# EAGLE board nixie-in2-x2 (EAGLE 5.04)
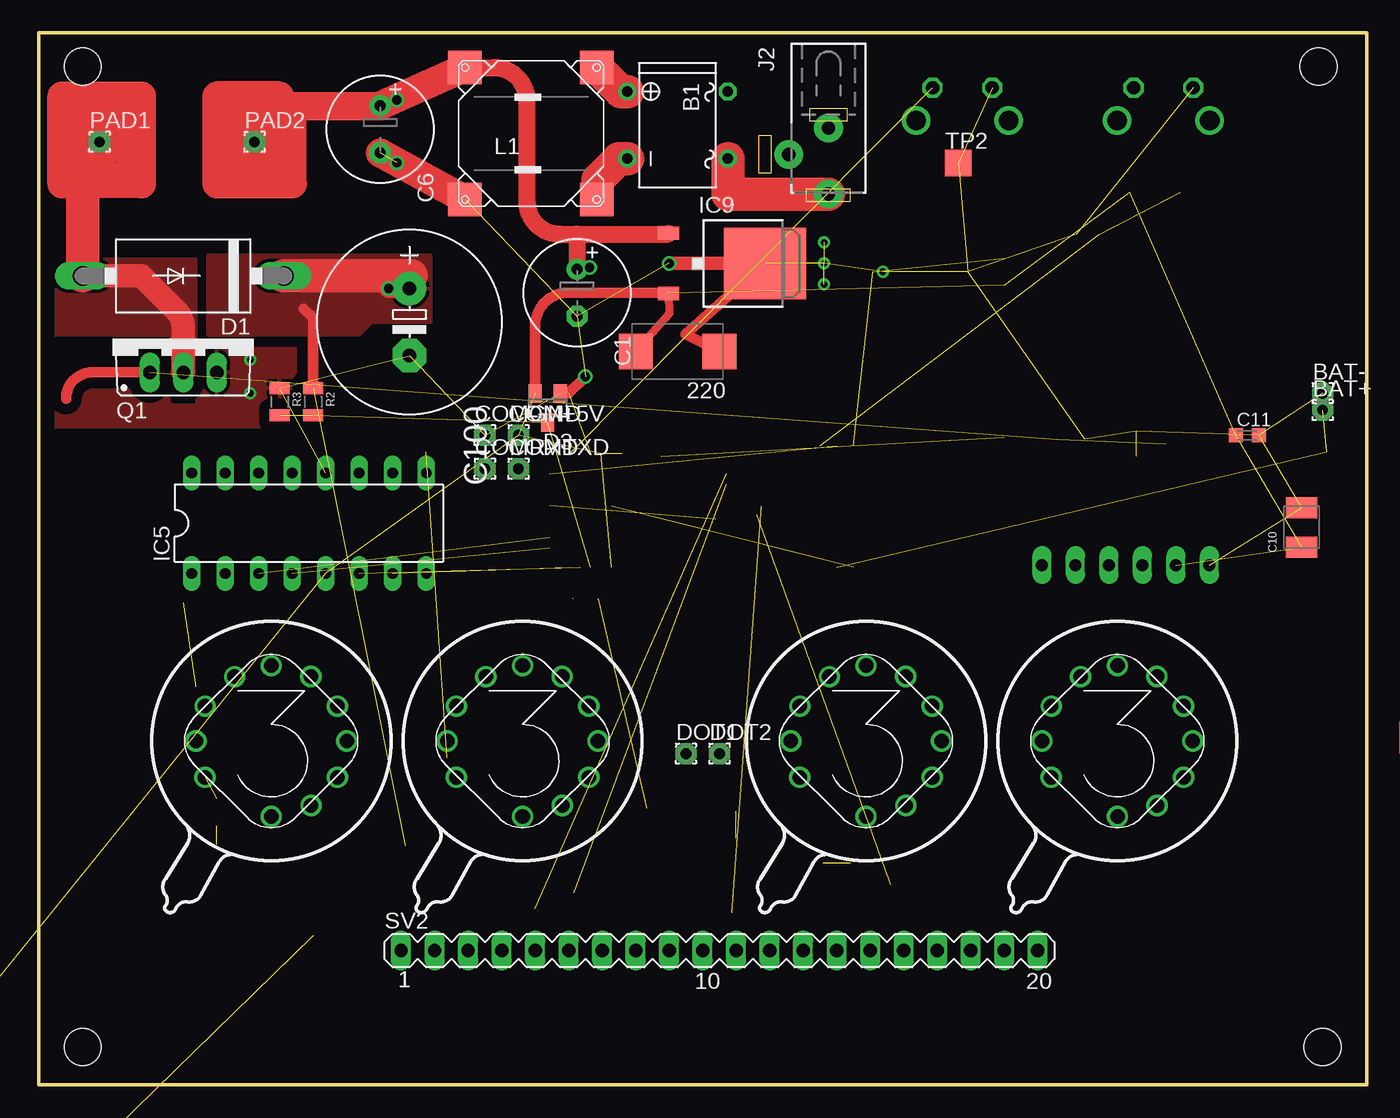
[diagram p0: board, top side]
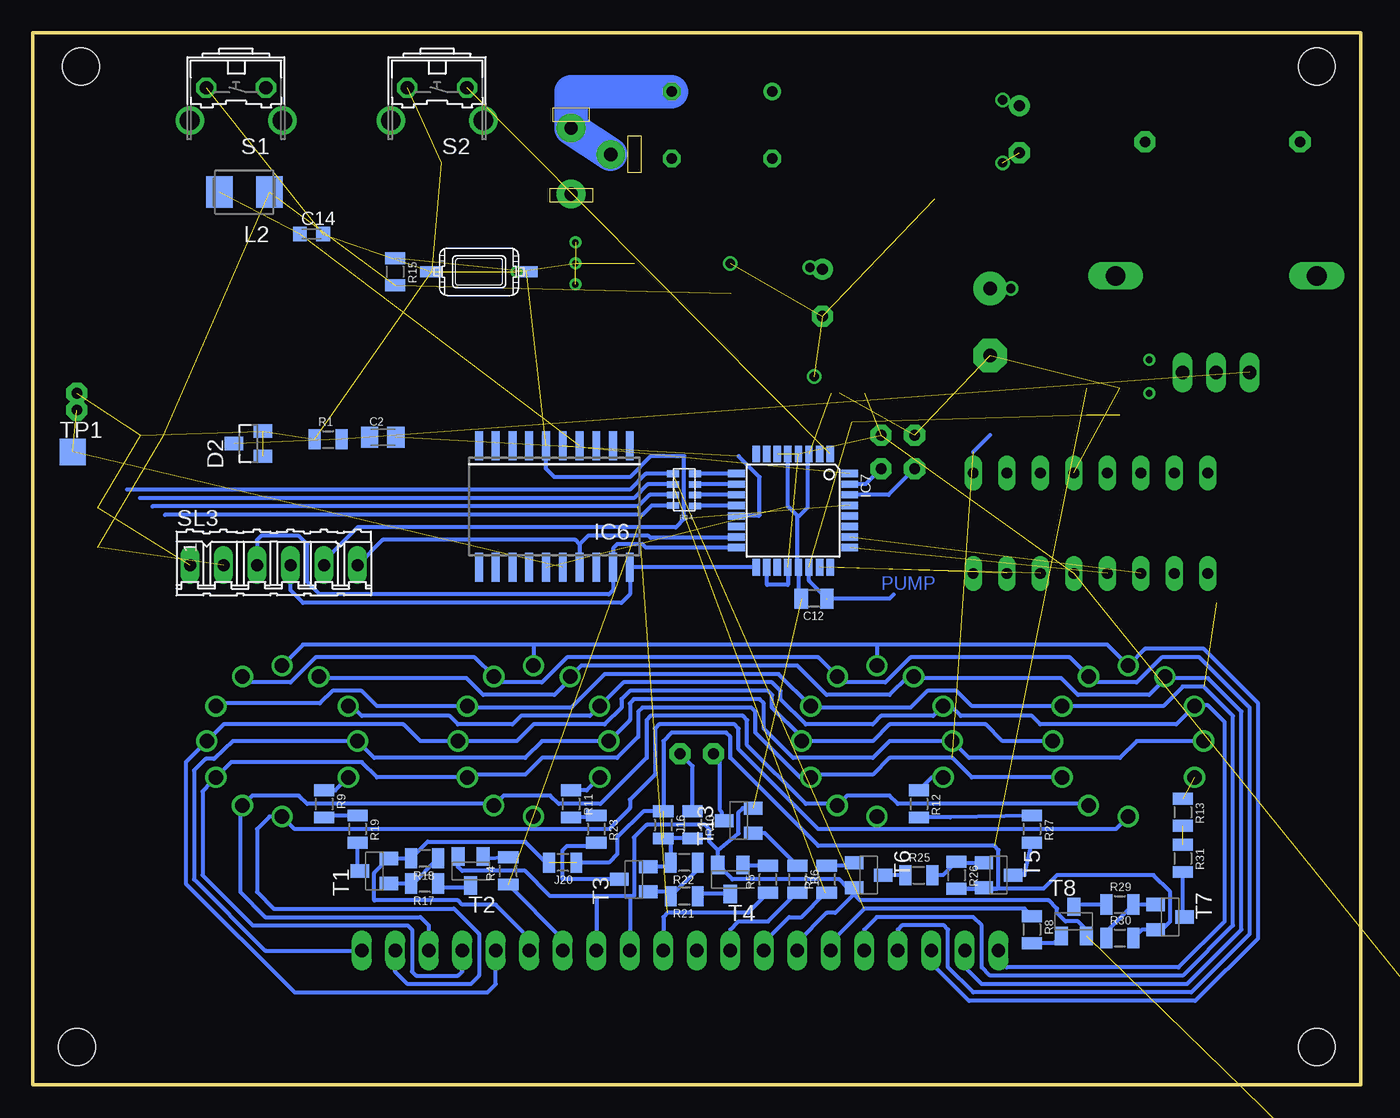
[diagram p1: board, bottom side, seen from below]

Size 100.64 x 79.68 mm. Coordinates in mm from the lower left corner, seen from the top.
Outline: 0,0 100.64,0 100.64,79.68 0,79.68 0,0
Copper layers (1*16): Top 0.035mm / dielectric 1.5mm / Bottom 0.035mm
Design rules "default *": minimum track width 10mil, minimum drill 24mil, track to track 10mil, track to pad 10mil, pad to pad 8mil, via to via 8mil, smd to smd 8mil, copper to edge 40mil, drill to drill 8mil, minimum pad ring 10mil, minimum via ring 8mil, stop-mask expansion 4mil, vias tented up to drill 0mil, thermal gap 10mil
Holes 2.8 mm at 3.33,2.85 3.33,77.15 96.99,77.15 97.31,2.85
tRestrict: area 5.6,65.1 to 18.6,78.1; area 72.9,35.2 to 78.9,40.3; area 64.3,30.2 to 84.6,32.7
bRestrict: area 0.2,63.8 to 22.7,79.4; area 85.9,46.7 to 89.4,52.7; 4 lines

## Footprints (pad centres in the part's own frame; a part is rotated, then mirrored left to right if it is on the bottom)
D/7343-31R = smd 2.55 x 2.7: + 3.175,0; - -3.175,0
B-DIL = drill 0.813 round: + -2.54,-3.81 | drill 0.813 octagon: - 2.54,-3.81; AC1 2.54,3.81; AC2 -2.54,3.81
1,6/0,8 = drill 0.813 pad 1.6 octagon: 1 0,0
E3,5-8 = drill 0.813 pad 1.6 round: + -1.778,0 | drill 0.813 pad 1.6 octagon: - 1.778,0
C0805K = smd 1.3 x 1.6: 1 -1,0; 2 1,0
SMC_B = smd 1.6 x 2.4: + -1.5,0; - 1.5,0
C0603K = smd 1.05 x 1.08: 1 -0.875,0; 2 0.875,0
C0805S = smd 1.016 x 1.524: 1 -0.977,0; 2 0.977,0
E5-13 = drill 1.016 pad 2.54 round: + -2.54,0 | drill 1.016 pad 2.54 octagon: - 2.54,0
DO201-15 = drill 1.499 long: A 7.62,0; C -7.62,0
SOT23 = smd 1 x 1.4: 1 -0.95,-1.1; 2 0.95,-1.1; 3 0,1.1
SOT23@1 = smd 1 x 1.4: 1 -0.95,-1.1; 2 0.95,-1.1; 3 0,1.1
DIL16 = drill 0.813 long: 1 -8.89,-3.81; 2 -6.35,-3.81; 3 -3.81,-3.81; 4 -1.27,-3.81; 5 1.27,-3.81; 6 3.81,-3.81; 7 6.35,-3.81; 8 8.89,-3.81; 9 8.89,3.81; 10 6.35,3.81; 11 3.81,3.81; 12 1.27,3.81; 13 -1.27,3.81; 14 -3.81,3.81; 15 -6.35,3.81; 16 -8.89,3.81
SO-20DW = smd 0.6 x 2.2: 1 -5.715,-4.6; 2 -4.445,-4.6; 3 -3.175,-4.6; 4 -1.905,-4.6; 5 -0.635,-4.6; 6 0.635,-4.6; 7 1.905,-4.6; 8 3.175,-4.6; 9 4.445,-4.6; 10 5.715,-4.6; 11 5.715,4.6; 12 4.445,4.6; 13 3.175,4.6; 14 1.905,4.6; 15 0.635,4.6; 16 -0.635,4.6; 17 -1.905,4.6; 18 -3.175,4.6; 19 -4.445,4.6; 20 -5.715,4.6
TQFP32-08 = smd 1.27 x 0.559: 1 -4.293,2.8; 2 -4.293,2; 3 -4.293,1.2; 4 -4.293,0.4; 5 -4.293,-0.4; 6 -4.293,-1.2; 7 -4.293,-2; 8 -4.293,-2.8; 17 4.293,-2.8; 18 4.293,-2; 19 4.293,-1.2; 20 4.293,-0.4; 21 4.293,0.4; 22 4.293,1.2; 23 4.293,2; 24 4.293,2.8 | smd 0.559 x 1.27: 9 -2.8,-4.293; 10 -2,-4.293; 11 -1.2,-4.293; 12 -0.4,-4.293; 13 0.4,-4.293; 14 1.2,-4.293; 15 2,-4.293; 16 2.8,-4.293; 25 2.8,4.293; 26 2,4.293; 27 1.2,4.293; 28 0.4,4.293; 29 -0.4,4.293; 30 -1.2,4.293; 31 -2,4.293; 32 -2.8,4.293
TO252 = smd 1 x 1.6: 1 -2.28,-4.8; 2 2.28,-4.8 | smd 5.4 x 6.2: 3 0,2.5
DCJ-SMALL = drill 1 pad 2.184 round: 1 0,3; 2 3,0; 3 0,-2
R0805-SVO = smd 0.9 x 1.524: 1 -1.027,0; 2 1.027,0
WE-SL2_74422... = smd 2.54 x 2.54: A1 -5,5; A2 5,5; B1 -5,-5; B2 5,-5
L4532M = smd 2 x 2.4: 1 -1.9,0; 2 1.9,0
IN-2 = drill 1.1 round: 0 -5.715,0; 1 0,-5.715; 2 3.016,-4.889; 3 5.02,-2.75; 4 5.715,0; 5 5.012,2.643; 6 3,4.897; 7 0,5.715; 8 -2.778,4.881; 9 -5.012,2.643; A -5.02,-2.75
TO220BV = drill 1.016 long: D 0,-2.54; G -2.54,-2.54; S 2.54,-2.54
RESSMD-YC16 = smd 0.508 x 0.914: R1$1 -1.23,-0.821; R1$2 -1.2,0.851; R2$1 -0.4,-0.821; R2$2 -0.4,0.851; R3$1 0.4,-0.821; R3$2 0.4,0.851; R4$1 1.2,-0.821; R4$2 1.2,0.851
B3F-31XX = drill 1.016 octagon: 1 -2.261,-1.245; 2 2.261,-1.245 | drill 1.499 pad 2.159 round: 3 -3.505,1.245; 4 3.505,1.245
06P = drill 0.914 long: 1 -6.35,0; 2 -3.81,0; 3 -1.27,0; 4 1.27,0; 5 3.81,0; 6 6.35,0
MA20-1 = drill 1.016 long: 1 -24.13,0; 2 -21.59,0; 3 -19.05,0; 4 -16.51,0; 5 -13.97,0; 6 -11.43,0; 7 -8.89,0; 8 -6.35,0; 9 -3.81,0; 10 -1.27,0; 11 1.27,0; 12 3.81,0; 13 6.35,0; 14 8.89,0; 15 11.43,0; 16 13.97,0; 17 16.51,0; 18 19.05,0; 19 21.59,0; 20 24.13,0
SW_IT1181 = smd 1.676 x 0.813: P$1 -3.61,0; P$2 3.61,0
SOT23-BEC = smd 1 x 1.4: B -0.95,-1.1; C 0,1.1; E 0.95,-1.1
TP20SQ = smd 2 x 2: TP 0,0

## Placement (x,y rotation side)
220  [D/7343-31R]  48.41,55.56 180 top
B1  [B-DIL]  48.41,72.7 270 top
BAT+  [1,6/0,8]  97.31,51.11 0 top
BAT-  [1,6/0,8]  97.31,52.38 0 top
C1  100/24V  [E3,5-8]  40.79,60 270 top
C2  33nF  [C0805K]  74.13,49.05 0 bottom
C5  10uF  [SMC_B]  -92.24,-100.33 0 top  (outside the outline)
C6  100/24V  [E3,5-8]  25.87,72.39 270 top
C9  10uF  [SMC_B]  -97.32,-100.33 0 top  (outside the outline)
C10  10uF  [SMC_B]  95.72,42.22 90 top
C11  100nF  [C0603K]  91.59,49.21 0 top
C12  1.0  [C0805S]  41.43,36.83 180 bottom
C13  100nF  [C0603K]  -96.05,-107.95 0 top  (outside the outline)
C14  100nF  [C0603K]  79.53,64.45 0 bottom
C15  100nF  [C0603K]  -96.05,-113.03 0 top  (outside the outline)
C100  10uF/250V  [E5-13]  28.09,57.78 270 top
COM+5V  [1,6/0,8]  36.35,49.21 0 top
COMGND  [1,6/0,8]  33.81,49.21 0 top
COMRXD  [1,6/0,8]  33.81,46.67 0 top
COMTXD  [1,6/0,8]  36.35,46.67 0 top
D1  31DF6  [DO201-15]  10.95,61.27 180 top
D2  BAT54C  [SOT23]  84.29,48.57 90 bottom
D3  BAT54S  [SOT23@1]  38.57,51.27 180 top
DOT1  [1,6/0,8]  49.05,25.08 0 top
DOT2  [1,6/0,8]  51.59,25.08 0 top
IC5  74141N  [DIL16]  20.47,42.54 0 top
IC6  DS3234  [SO-20DW]  61.11,43.81 180 bottom
IC7  MEGA8-AI  [TQFP32-08]  43.02,43.49 270 bottom
IC9  7805DT  [TO252]  52.54,62.23 270 top
J2  [DCJ-SMALL]  59.84,70.48 180 top
J16  000  [R0805-SVO]  52.86,19.68 270 bottom
J20  000  [R0805-SVO]  60.48,16.82 180 bottom
L1  CHOKE-510-1010  [WE-SL2_74422...]  37.3,72.07 180 top
L2  [L4532M]  84.61,67.62 180 bottom
N1  IN-2  [IN-2]  81.75,26.03 0 top
N2  IN-2  [IN-2]  62.7,26.03 0 top
N3  IN-2  [IN-2]  36.66,26.03 0 top
N4  IN-2  [IN-2]  17.61,26.03 0 top
PAD1  [1,6/0,8]  4.6,71.43 0 top
PAD2  [1,6/0,8]  16.34,71.43 0 top
Q1  IRF630N  [TO220BV]  10.95,56.51 0 top
R1  91K  [R0805-SVO]  78.26,48.89 0 bottom
R2  470K  [R0805-SVO]  20.79,51.75 270 top
R3  4K7  [R0805-SVO]  18.25,51.75 270 top
R4  1K  [R0805-SVO]  64.61,16.19 90 bottom
R5  1K  [R0805-SVO]  44.92,15.55 90 bottom
R6  1K  [R0805-SVO]  42.7,15.55 270 bottom
R7  1K  [R0805-SVO]  40.48,15.55 90 bottom
R8  1K  [R0805-SVO]  24.92,11.74 270 bottom
R9  33K  [R0805-SVO]  78.58,21.27 270 bottom
R10  1K2  [R0805-SVO]  50.63,19.68 270 bottom
R11  33K  [R0805-SVO]  59.84,21.27 270 bottom
R12  33K  [R0805-SVO]  33.49,21.27 270 bottom
R13  33K  [R0805-SVO]  13.49,20.63 270 bottom
R14  [RESSMD-YC16]  51.27,45.08 90 bottom
R15  10K  [R0805-SVO]  73.18,61.59 270 bottom
R17  100K  [R0805-SVO]  70.95,15.24 180 bottom
R18  2.4K  [R0805-SVO]  70.95,17.14 180 bottom
R19  33K  [R0805-SVO]  76.03,19.36 270 bottom
R21  100K  [R0805-SVO]  51.27,14.28 180 bottom
R22  2.4K  [R0805-SVO]  51.27,16.82 180 bottom
R23  33K  [R0805-SVO]  57.94,19.36 270 bottom
R25  100K  [R0805-SVO]  33.49,15.87 0 bottom
R26  2.4K  [R0805-SVO]  30.63,15.87 270 bottom
R27  33K  [R0805-SVO]  24.92,19.36 270 bottom
R29  100K  [R0805-SVO]  18.25,13.65 0 bottom
R30  2.4K  [R0805-SVO]  18.25,11.11 0 bottom
R31  33K  [R0805-SVO]  13.49,17.14 270 bottom
S1  [B3F-31XX]  85.24,74.29 180 bottom
S2  [B3F-31XX]  70,74.29 180 bottom
SL3  [06P]  82.39,39.37 0 bottom
SV2  [MA20-1]  51.59,10.16 0 top
SW1  BUTTON-IT_1181  [SW_IT1181]  66.83,61.59 0 bottom
T1  BTA92  [SOT23-BEC]  74.77,16.19 90 bottom
T2  BTA42  [SOT23-BEC]  67.46,16.19 180 bottom
T3  BTA92  [SOT23-BEC]  55.08,15.55 90 bottom
T4  BTA42  [SOT23-BEC]  47.78,15.55 180 bottom
T5  BTA92  [SOT23-BEC]  27.46,15.87 270 bottom
T6  BTA42  [SOT23-BEC]  37.3,15.87 270 bottom
T7  BTA92  [SOT23-BEC]  14.44,12.7 270 bottom
T8  BTA42  [SOT23-BEC]  21.74,12.38 0 bottom
T13  BTA42  [SOT23-BEC]  47.14,20 90 bottom
TP1  TPSTP20SQ  [TP20SQ]  97.62,47.94 0 bottom
TP2  TPSTP20SQ  [TP20SQ]  69.69,69.84 0 top

## Library data of the parts
220 C1 C2 C5 C6 C9-C15 C100 J16 J20 L2 R1-R13 R15 R17-R19 R21-R23 R25-R27 R29-R31 = rcl
B1 = rectifier
BAT+ BAT- COM+5V COMGND COMRXD COMTXD DOT1 DOT2 PAD1 PAD2 = wirepad
D1-D3 = diode
IC5 = 74xx-eu
IC6 = 0-ds3234
IC7 = atmel
IC9 = linear
J2 L1 R14 SW1 TP1 TP2 = 0-svo
N1-N4 = 0-nixies-russian
Q1 = transistor-power
S1 S2 = switch-omron
SL3 = con-amp-quick
SV2 = con-lstb
T1-T8 T13 = transistor

## Nets
+5V: 220.+ C5.- C9.- C10.+ C11.1 C13.2 C15.2 COM+5V.1 D3.2 IC5.5 IC7.4 IC7.6 IC7.18 IC7.20 IC9.2 L2.1 R15.2 SL3.2
+UB: C1.+ C6.+ IC9.1 L1.B2 PAD2.1
BTN+: S1.1
BTNSET: IC7.1 S2.1
C0: N1.0 N2.0 N3.0 N4.0 SV2.20
C1: N1.1 N2.1 N3.1 N4.1 SV2.19
C2: N1.2 N2.2 N3.2 N4.2 SV2.18
C3: N1.3 N2.3 N3.3 N4.3 SV2.17
C4: N1.4 N2.4 N3.4 N4.4 SV2.16
C5: N1.5 N2.5 N3.5 N4.5 SV2.5
C6: N1.6 N2.6 N3.6 N4.6 SV2.4
C7: N1.7 N2.7 N3.7 N4.7 SV2.3
C8: N1.8 N2.8 N3.8 N4.8 SV2.2
C9: N1.9 N2.9 N3.9 N4.9 SV2.1
D0: IC5.3 IC7.26
D1: IC5.6 IC7.23
D2: IC5.7 IC7.24
D3: IC5.4 IC7.25
DOT: R6.2 SV2.9
FBACK: C12.1 D3.3 IC7.22 R2.2 R3.2
GND: 220.- BAT-.1 C1.- C5.+ C6.- C9.+ C10.- C11.2 C12.2 C13.1 C14.2 C15.1 C100.- COMGND.1 D2.1 D2.2 D3.1 IC5.12 IC6.15 IC7.3 IC7.5 IC7.21 IC9.3 L1.A2 Q1.S R1.1 R3.1 S1.2 S2.2 SL3.1 SV2.7 SV2.12 SV2.13 SW1.P$1 T2.E T4.E T6.E T8.E T13.E TP2.TP
HV+: C100.+ D1.C J16.1 J16.2 J20.1 J20.2 R2.1 R10.2 R18.2 R22.2 R26.2 R30.2 SV2.15 T1.E T3.E T5.E T7.E
HVPUMP: C2.2 IC7.13
MISO: IC6.19 IC7.16 SL3.3
MOSI: IC6.17 IC7.15 SL3.6
N$1: DOT2.1 R10.1
N$2: IC6.18
N$3: C2.1 D2.3 Q1.G R1.2
N$4: R4.2 T2.B
N$5: R19.2 T1.C
N$6: N1.A R9.1
N$7: D1.A PAD1.1 Q1.D
N$8: R5.2 T4.B
N$9: BAT+.1 IC6.16 TP1.TP
N$10: R9.2 R19.1
N$11: R21.2 R22.1 T3.B
N$12: R21.1 T4.C
N$13: R23.2 T3.C
N$14: N2.A R11.1
N$15: R7.2 T6.B
N$16: R25.2 R26.1 T5.B
N$17: R25.1 T6.C
N$18: R27.2 T5.C
N$19: R11.2 R23.1
N$20: R8.2 T8.B
N$21: R6.1 T13.B
N$22: R29.2 R30.1 T7.B
N$23: R29.1 T8.C
N$24: R31.2 T7.C
N$25: B1.+ L1.B1
N$26: R17.2 R18.1 T1.B
N$27: N3.A R12.1
N$28: R12.2 R27.1
N$29: N4.A R13.1
N$30: R13.2 R31.1
N$31: IC7.11 R14.R2$1
N$32: IC7.10 R14.R3$1
N$33: B1.- L1.A1
N$34: IC7.9 R14.R4$1
N$35: IC7.12 R14.R1$1
N$39: R17.1 T2.C
N$51: DOT1.1 T13.C
N$53: C14.1 IC6.4 L2.2
N$64: B1.AC2 J2.2 J2.3
N$65: B1.AC1 J2.1
RESET#: IC6.6 IC7.29 R15.1 SL3.5 SW1.P$2
RTCINT: IC6.5 IC7.32
RTCSEL#: IC6.1
RXD: COMRXD.1 IC7.30
SA1: R4.1 R14.R1$2 SV2.14
SA2: R5.1 R14.R2$2 SV2.11
SA3: R7.1 R14.R3$2 SV2.8
SA4: R8.1 R14.R4$2 SV2.6
SCK: IC6.20 IC7.17 SL3.4
TXD: COMTXD.1 IC7.31

## Tracks (layer width: path | path; a pad name or v marks a point on that pad's centre or on a via)
+5V  (14 unrouted)
  Top 0.61: 220.+ 47.78,58.41 IC9.2
  Top 0.813: IC9.2 47.68,60 40.12,60 arc90 37.62,57.5 D3.2
  Bottom 0.305: IC7.18 45,39.18 45,37.86 43.41,37.86 IC7.20
+UB  (via drill 0.7)
  Top 0.61: C6.+ v27.14,74.61
  Top 0.8: C1.+ v41.74,61.91
  Top 0.813: C6.+ 26.19,74.61
  Top 1.27: L1.B2 34.48,77.07 arc-90 36.98,74.57 36.98,66.95 arc90 39.48,64.45 40.79,64.45 | 40.79,64.45 47.68,64.45 IC9.1 | 18.25,69.21 15.08,69.21 15.08,73.97 16.34,74.29 | 40.79,64.45 C1.+
  Top 2.184: 18.25,69.21 18.25,74.92 13.49,74.92 13.49,68.26 19.2,68.26 19.2,74.13 C6.+ L1.B2 | 16.34,74.29 PAD2.1 16.34,69.53
BTNSET  (1 unrouted)
C0
  Bottom 0.305: N4.0 16.98,26.03 18.25,24.76 29.68,24.76 N3.0 35.71,26.03 36.98,24.76 43.02,24.76 45.24,26.98 45.24,28.89 45.55,29.21 55.08,29.21 55.4,28.89 55.4,27.62 N2.0 62.06,26.03 63.34,24.76 74.77,24.76 N1.0 85.48,26.03 86.91,24.68 87.54,24.68 88.42,23.81 88.42,15.55 83.02,10.16 SV2.20
C1
  Bottom 0.305: 36.66,19.36 18.57,19.36 N4.1 | 36.66,19.36 41.11,19.36 47.14,25.39 47.14,26.98 47.46,27.3 53.17,27.3 53.49,26.98 53.49,23.49 55.4,21.59 55.4,20.95 56.98,19.36 62.7,19.36 | 62.7,19.36 80.8,19.36 N1.1 82.7,20.32 83.66,19.36 83.66,14.6 82.39,13.33 68.73,13.33 66.83,11.43 66.83,8.25 67.46,7.61 72.22,7.61 73.18,8.57 SV2.19 | 36.66,19.36 N3.1 | 62.7,19.36 N2.1
C2
  Bottom 0.305: N1.2 84,21.9 80.48,21.9 79.84,21.27 65.84,21.27 N2.2 64.95,21.9 61.43,21.9 60.8,21.27 57.62,21.27 54.13,24.76 54.13,27.62 53.81,27.94 46.82,27.94 46.51,27.62 46.51,25.71 42.06,21.27 39.81,21.27 N3.2 38.92,21.9 35.71,21.9 35.08,21.27 21.19,21.27 21.06,21.14 N4.2 | N1.2 84.96,20.95 | SV2.18 70.64,12.06 71.27,12.7 83.02,12.7 84.92,14.6 84.92,20.98 N1.2
C3  (1 unrouted)
  Bottom 0.305: N4.3 29.47,23.28 30.95,24.76 35.71,24.76 36.98,23.49 41.48,23.49 N3.3 42.49,23.28 45.87,26.66 45.87,28.25 46.19,28.57 54.45,28.57 54.76,28.25 54.76,26.35 56.35,24.76 62.06,24.76 63.34,23.49 67.51,23.49 N2.3 74.55,23.28 75.72,24.44 85.61,24.44 N1.3 87.15,22.9 87.15,22.86 87.78,22.22 87.78,15.87 83.97,12.06 72.22,12.06 71.91,11.74 71.91,8.57 71.59,8.25 68.41,8.25 68.1,8.57 SV2.17 | 28.09,49.21 29.36,47.94
C4
  Bottom 0.305: N4.4 27.14,26.03 28.41,27.3 35.71,27.3 36.98,26.03 N3.4 42.38,26.35 44.6,28.57 44.6,29.52 44.92,29.84 55.4,29.84 56.03,29.21 56.03,28.57 57.3,27.3 62.7,27.3 63.97,26.03 N2.4 71.27,26.03 72.54,27.3 86.19,27.3 N1.4 89.05,24.44 89.05,15.24 80.8,6.98 66.19,6.98 65.56,7.61 SV2.16
C5  (1 unrouted)
  Bottom 0.305: N1.5 86.55,28.89 78.89,28.89 77.94,29.84 75.72,29.84 74.55,28.67 N2.5 67.61,28.57 59.84,28.57 57.3,31.11 44.11,31.11 N3.5 41.57,28.57 34.12,28.57 32.85,29.84 30.63,29.84 29.46,28.67 N4.5 14.97,28.67 13.49,30.16 11.9,30.16 9.68,27.94 9.68,12.06 13.49,8.25 28.09,8.25 28.73,8.88 28.73,12.06 29.36,12.7 36.66,12.7 37.62,11.74 SV2.5
C6
  Bottom 0.305: N1.6 84.3,30.48 81.11,30.48 79.21,32.38 67.14,32.38 N2.6 65.25,30.48 62.06,30.48 60.16,32.38 41.11,32.38 N3.6 39.21,30.48 36.03,30.48 34.12,32.38 22.06,32.38 22.06,32.37 N4.6 20.16,30.48 16.98,30.48 15.08,32.38 12.22,32.38 8.41,28.57 8.41,11.43 12.85,6.98 29.36,6.98 31.27,8.88 31.27,11.74 31.58,12.06 34.76,12.06 35.08,11.74 SV2.4
C7
  Bottom 0.305: N1.7 80.16,33.33 62.7,33.33 | 36.66,33.33 19.2,33.33 N4.7 16.34,33.02 11.9,33.02 7.77,28.89 7.77,11.11 12.54,6.34 29.68,6.34 32.54,9.2 SV2.3 | 36.66,33.33 62.7,33.33 | 36.66,33.33 N3.7 | 62.7,33.33 N2.7
C8
  Bottom 0.305: N4.8 14.84,30.71 15.08,30.48 | 15.08,30.48 16.03,29.52 21.42,29.52 22.7,30.79 33.77,30.79 N3.8 34.32,30.91 35.71,29.52 40.48,29.52 42.7,31.75 59.09,31.75 N2.8 | N2.8 59.8,30.79 | N2.8 59.92,30.71 61.11,29.52 66.51,29.52 67.78,30.79 78.85,30.79 N1.8 | 15.08,30.48 14.76,30.79 11.58,30.79 9.04,28.25 9.04,11.74 13.17,7.61 28.73,7.61 30,8.88 SV2.2
C9
  Bottom 0.305: N1.9 76.46,28.67 75.72,27.94 69.05,27.94 68.41,27.3 64.29,27.3 63.65,27.94 58.43,27.94 N2.9 | N2.9 57.09,28.67 | SV2.1 27.46,9.52 26.82,8.88 13.81,8.88 10.31,12.38 10.31,27.47 11.58,28.74 12.54,28.74 N4.9 13.98,27.3 24.28,27.3 24.92,27.94 30.31,27.94 31.05,28.67 N3.9 32.39,27.94 36.35,27.94 36.98,27.3 42.06,27.3 43.97,29.21 43.97,29.84 44.6,30.48 55.89,30.48 N2.9
D0  (1 unrouted)
D1  (1 unrouted)
D2  (1 unrouted)
D3  (1 unrouted)
DOT
  Bottom 0.305: R6.2 42.77,14.53 44.92,12.38 47.14,12.38 47.78,11.74 SV2.9
FBACK  (4 unrouted)
  Bottom 0.305: IC7.22 41.81,38.19 C12.1 | 40.48,36.83 35.71,36.83 35.39,37.14
GND  (via drill 0.5, 0.7)  (31 unrouted)
  Top 0.8: D3.1 40.15,52.37 v41.43,53.65
  Top 0.813: IC9.3 49.01,56.87 220.-
  Top 1.016: IC9.3 v47.78,62.23
  Top 2.184: L1.A2 C6.-
  Bottom 0.305: IC7.21 42.7,39.28 42.7,43.1 | 42.7,43.1 43.41,43.81 IC7.5 | IC7.3 41.9,47.7 41.9,43.73 42.54,43.1 42.7,43.1 | IC7.21 42.7,39.12 | IC7.21 42.62,37.04 C12.2 | 38.4,14.43 T6.E 38.89,14.92 39.52,15.55 47.63,15.55 T4.E 48.73,17.77 | 38.4,14.43 37.94,13.96 23.65,13.96 23.01,13.33 23.01,13.01 22.38,12.38 21.42,12.38 20.79,11.74 T8.E | T2.E 68.41,16.5 68.1,16.19 63.34,16.19 61.43,14.28 57.94,14.28 | T13.E 46.83,20.95 47.14,20.63 47.14,19.04 48.73,17.77 | 48.73,17.77 49.37,18.41 49.37,19.36 49.68,19.68 54.13,19.68 55.08,18.73 55.08,14.28 55.4,14.28 | 55.4,14.28 57.94,14.28 | SV2.7 42.7,10.79 40.48,13.01 39.82,13.01 38.4,14.43 | 57.94,14.28 SV2.13 | 55.4,14.28 SV2.12
  other vias: 27.14,69.84 59.52,63.81 59.52,60.64 59.52,62.23 63.97,61.59 16.03,54.92 16.03,52.38
  pour Top (isolate 0.813, rank 2): 1.1,61.27 1.1,49.84 21.42,49.84 21.42,61.27
HV+  (via drill 0.7)  (3 unrouted)
  Top 0.8: 20.08,58.81 20.79,58.1 R2.1
  Top 1.422: 28.2,61.27 28.41,61.06 28.41,60.64 C100.+ v26.5,60.32
  Top 2.54: D1.C 28.2,61.27
  Bottom 0.305: T3.E 52.3,16.5 R22.2 52.3,18.58 52.22,18.65 | R30.2 16.59,11.75 T7.E 15.08,11.74 14.44,12.38 14.44,14.6 15.71,15.87 23.01,15.87 24.04,14.84 28.32,14.84 | 28.32,14.84 R26.2 27.53,14.84 27.46,14.92 27.46,17.78 27.77,18.09 41.11,18.09 47.78,24.76 47.78,26.35 48.09,26.66 52.22,26.66 52.86,26.03 J16.1 54.37,20.71 56.35,18.73 56.35,17.46 56.98,16.82 J20.1 | 28.32,14.84 T5.E | R10.2 52.22,18.65 | 52.22,18.65 J16.2 | J20.2 61.75,16.82 63.34,18.41 70.71,18.41 R18.2 T1.E 74.77,16.04 74.77,13.96 68.41,13.96 68.1,13.65 65.56,13.65 63.02,11.11 SV2.15
  pour Top (isolate 0.813): 12.85,62.54 12.85,56.83 24.28,56.83 25.23,57.78 29.68,57.78 29.68,62.86 12.85,62.86
HVPUMP  (1 unrouted)
  Bottom 0.305: IC7.13 45.64,43.09 45.55,43.17 45.55,46.03 47.14,47.62
MISO
  Bottom 0.305: IC7.16 54.19,40.69 54.45,40.95 56.35,40.95 56.67,40.63 IC6.19 56.67,37.46 56.98,37.14 78.89,37.14 79.84,38.09 79.84,40.95 80.48,41.59 83.34,41.59 83.66,41.27 SL3.3
MOSI
  Bottom 0.305: IC7.15 47.37,41.43 53.81,41.43 53.97,41.59 58.57,41.59 59.21,40.95 | 59.21,40.95 IC6.17 | SL3.6 74.13,41.27 59.52,41.27 59.21,40.95
N$1
  Bottom 0.305: R10.1 50.63,24.12 DOT2.1
N$3  (3 unrouted)
  Top 0.8: 4.06,53.97 Q1.G
  Top 0.813: 2.06,51.97 arc-90 4.06,53.97
N$4
  Bottom 0.305: T2.B 66.51,17.07 R4.2
N$5
  Bottom 0.305: R19.2 76.03,16.36 T1.C
N$6
  Bottom 0.305: R9.1 77.72,22.29 N1.A
N$7
  Top 1.27: PAD1.1 4.28,71.43 4.28,72.7 5.55,72.7 5.55,70.48 3.64,70.48 3.64,73.66 6.5,73.66 6.5,69.21 2.69,69.21 2.69,74.61 7.77,74.61
  Top 1.778: Q1.D 10.95,57.35 arc45 10.42,58.62 7.77,61.27 D1.A
  Top 2.184: 7.77,74.61 7.77,68.26 1.74,68.26 1.74,74.92 7.77,74.92
  Top 2.54: D1.A 3.33,69.42 arc-45 3.85,70.69 PAD1.1
  pour Top (isolate 0.813): 1.1,62.54 11.9,62.54 11.9,52.38 10,52.7 10,56.83 1.1,56.83
N$8
  Bottom 0.305: 46.83,16.43 T4.B 46.75,16.58 R5.2
N$9  (2 unrouted)
N$10
  Bottom 0.305: R19.1 78.43,20.39 R9.2
N$11
  Bottom 0.305: T3.B 52.62,14.6 R21.2 50.24,16.34 R22.1
N$12
  Bottom 0.305: R21.1 50.07,14.45 T4.C
N$13
  Bottom 0.305: T3.C 60.48,15.55 60.48,17.78 60.16,18.09 58.18,18.09 R23.2
N$14
  Bottom 0.305: R11.1 58.67,22.29 N2.A
N$15
  Bottom 0.305: 38.48,16.9 T6.B 38.64,16.58 R7.2
N$16
  Bottom 0.305: R25.2 31.66,15.87 R26.1 30.55,16.82 T5.B
N$17
  Bottom 0.305: R25.1 T6.C
N$18
  Bottom 0.305: T5.C 25.48,15.87 R27.2
N$19
  Bottom 0.305: R11.2 58.09,20.24 R23.1
N$20
  Bottom 0.305: T8.B 22.69,11.5 | T8.B 22.94,11.03 | R8.2 23.25,10.71 T8.B
N$21
  Bottom 0.305: T13.B 45.17,19.05 R6.1
N$22
  Bottom 0.305: R30.1 19.28,11.59 R29.2 T7.B
N$23
  Bottom 0.305: T8.C 21.57,13.65 R29.1
N$24
  Bottom 0.305: T7.C 13.49,12.84 R31.2
N$25
  Top 2.54: B1.+ 44.12,75.24 L1.B1
N$26
  Bottom 0.305: T1.B 72.3,15.24 R17.2 71.98,15.09 R18.1
N$27
  Bottom 0.305: R12.1 32.5,23.28 N3.A
N$28
  Bottom 0.305: R27.1 31.1,20.24 R12.2
N$29  (1 unrouted)
N$30  (1 unrouted)
N$31
  Bottom 0.305: IC7.11 47.32,44.68 R14.R2$1
N$32
  Bottom 0.305: IC7.10 47.32,45.48 R14.R3$1
N$33
  Top 0.813: L1.A1 42.38,67.15
  Top 1.27: 42.38,67.15 42.38,68.58
  Top 2.54: B1.- 43.97,70.16 42.38,68.58
N$34
  Bottom 0.305: IC7.9 47.32,46.28 R14.R4$1
N$35
  Bottom 0.305: IC7.12 47.35,43.85 R14.R1$1
N$39
  Bottom 0.305: T2.C 67.63,14.92 69.61,14.92 R17.1
N$51
  Bottom 0.305: DOT1.1 48.56,24.59 48.56,20.78 48.41,20.63 48.41,20.17 T13.C
N$53  (2 unrouted)
N$64
  Bottom 2.54: B1.AC2 59.84,75.24 J2.3 J2.2
N$65
  Top 2.54: J2.1 52.22,67.46 B1.AC1
RESET#  (3 unrouted)
  Bottom 0.305: SL3.5 78.58,39.68 76.03,42.22 51.91,42.22 51.27,42.86 51.27,47.62 53.81,47.62 55.4,46.03 61.11,46.03 61.75,46.67 IC6.6
RTCINT  (1 unrouted)
RXD
  Bottom 0.305: IC7.30 35.78,44.69 COMRXD.1
SA1  (1 unrouted)
  Bottom 0.305: R14.R1$2 53.74,43.88 54.45,43.17 90.64,43.17 | SV2.14 60.48,11.03 R4.1
SA2  (1 unrouted)
  Bottom 0.305: R14.R2$2 53.89,44.68 54.76,43.81 91.59,43.81 | 45.24,14.21 R5.1 46.43,13.01 52.54,13.01 52.86,12.7 SV2.11
SA3  (1 unrouted)
  Bottom 0.305: R14.R3$2 54.05,45.48 55.08,44.45 92.55,44.45 | R7.1 40.55,14.53 42.38,12.7 43.33,12.7 45.24,10.79 SV2.8
SA4  (1 unrouted)
  Bottom 0.305: R14.R4$2 54.2,46.28 55.4,45.08 93.5,45.08 | SV2.6 40.16,10.79 37.62,13.33 25.48,13.33 R8.1
SCK
  Bottom 0.305: IC7.17 45.82,39.21 IC6.20 55.4,37.14 56.03,36.51 80.16,36.51 81.11,37.46 SL3.4
TXD
  Bottom 0.305: IC7.31 37.52,45.49 COMTXD.1

## Text on the board
Top: PATASHNIK
Bottom: PUMP
SMD1: 2009